# Altium PCB BuckConverter.PcbDoc
Units mil, origin at the board's own origin, x right, y up, seen from the top; angles counter-clockwise.
Board outline 3937.01 x 3937.01 mil, 2 copper layers (Top Layer, Bottom Layer); 134 components, 71 nets, 391 pads, 13 vias.
Unrouted connection lines stored in the file: 279.
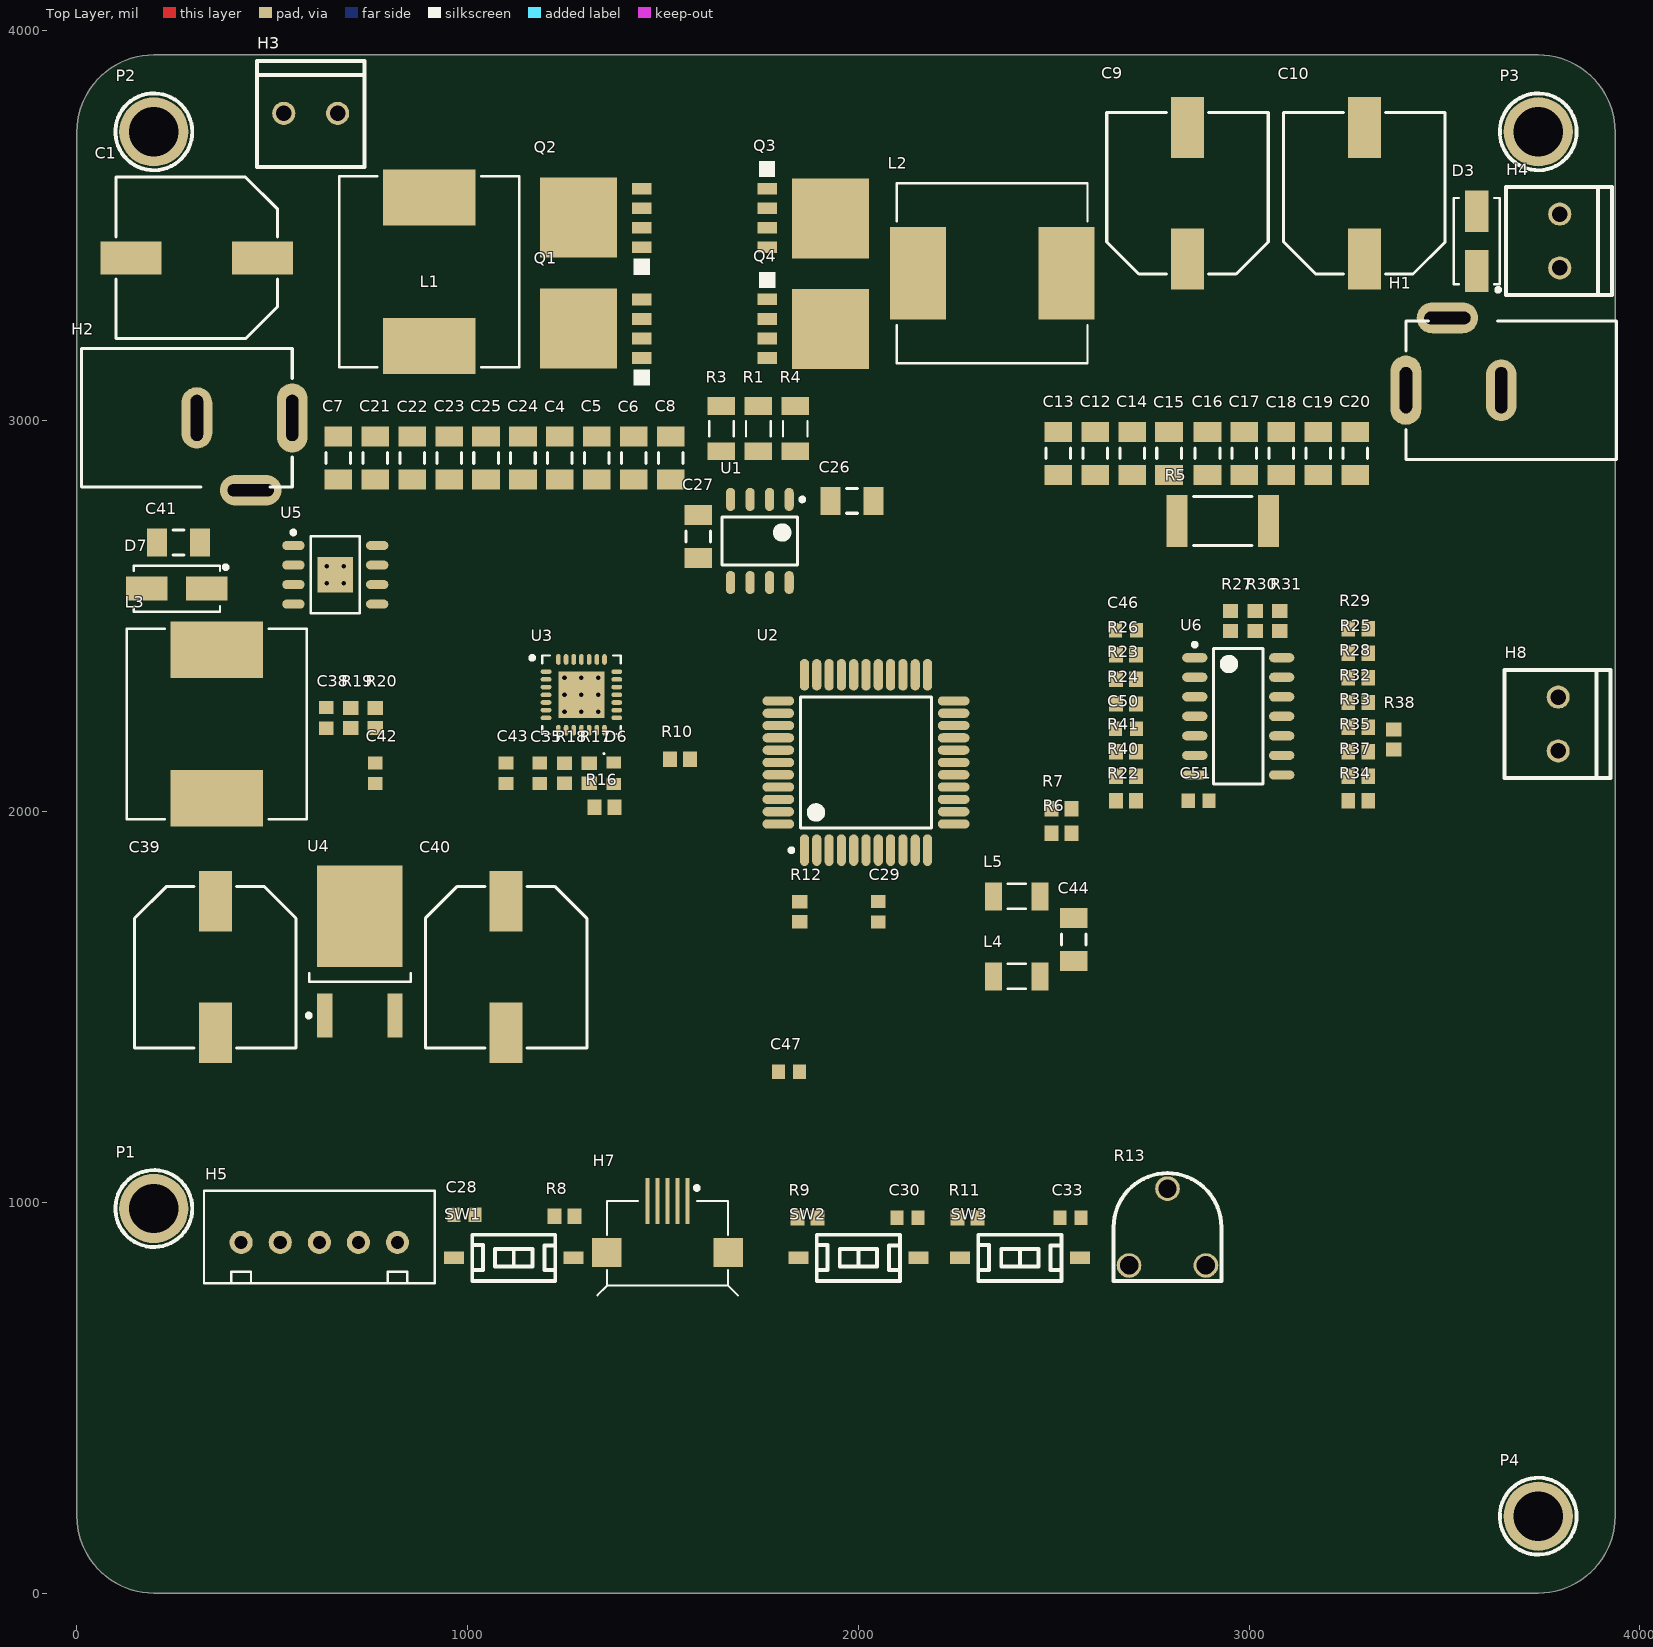
[diagram p0: Top Layer view]
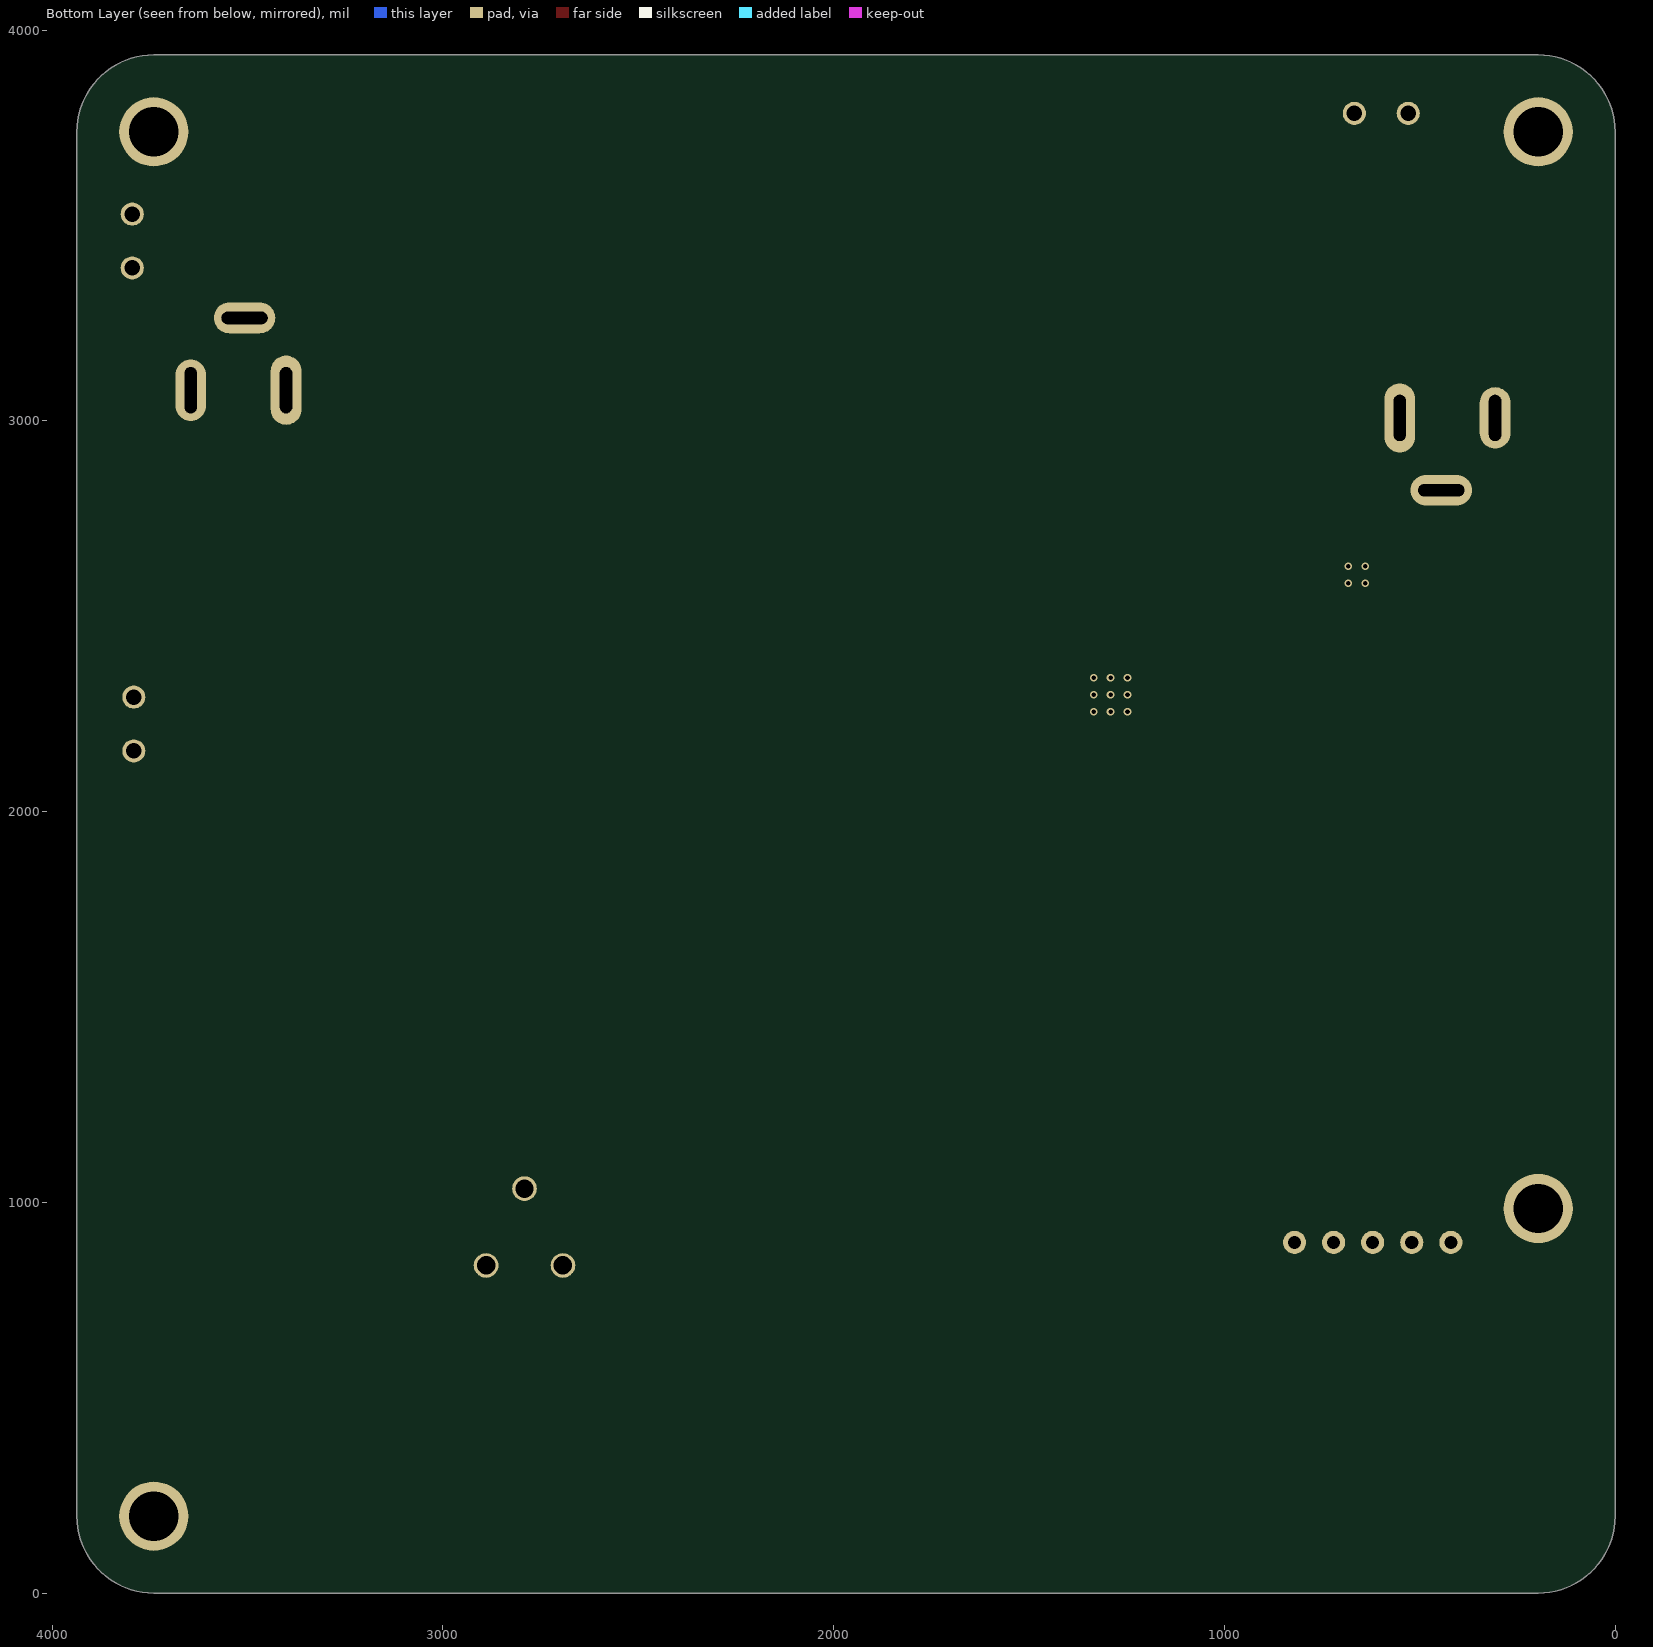
[diagram p1: Bottom Layer view, seen from below]

## Layer stack, top to bottom
Top Solder: solder mask 0.4, Solder Resist, Dk 3.5
Top Layer: signal copper 1.4
Dielectric 1: dielectric 12.6, FR-4, Dk 4.8
Bottom Layer: signal copper 1.4
Bottom Solder: solder mask 0.4, Solder Resist, Dk 3.5

## Board outline
0,196.85 0,3740.16 cw(c196.85,3740.16) 196.85,3937.01 3740.16,3937.01 cw(c3740.16,3740.16) 3937.01,3740.16 3937.01,196.85 cw(c3740.16,196.85) 3740.16,0 196.85,0 cw(c196.85,196.85)

## Design rules (kind name [scope] priority, off if disabled: settings)
Clearance [All] p1: gap=10 ignorepadtopadclearanceinfootprint=FALSE except(0: Arc-Hole Track-Hole SMDPad-Hole THPad-Hole Via-Hole Fill-Hole Poly-Hole Region-Hole Text-Hole; 6: SMDPad-SMDPad)
ComponentClearance [All] p1 off: gap=10 collisioncheckmode=3 verticalgap=10 showdistances=FALSE
Height [All] p1 off: minheight=0 maxheight=1000 prefheight=500
HoleSize [All] p1: absolutevalues=TRUE maxlimit=1100 minlimit=0.98 maxpercent=80.000 minpercent=20.000
MinimumSolderMaskSliver [InComponent('*')] p1: minsoldermaskwidth=0
PolygonConnect [All] p1: connectstyle=Relief reliefconductorwidth=10 reliefentries=4 polygonreliefangle="90 Angle" airgapwidth=10
RoutingVias [All] p1: holewidth=28 width=50 viastyle="Through Hole" minholewidth=28 minwidth=50 maxholewidth=28 maxwidth=50
SolderMaskExpansion [All] p1: expansion=4
Width [All] p1: maxlimit=100 minlimit=10 preferedwidth=10
26 further rules are at their usual default settings.

## Classes and differential pairs
component class Designator: C45 C46 C47 C48 C49 C50 C51 C52 H8 R22 R23 R24 R25 R26 R27 R28 R29 R30 R31 R32 R33 R34 R35 R36 R37 R38 R39 R40 R41 U6

## Components (designator, comment, footprint, x,y, rotation, side; value= is the part's Value field where it differs from the comment)
C1 "100uF" CAPAE109103X105N 307.09,3417.32 r0 top
C2 "22uF" CAP1206 12527.53,641.73 r0 top
C3 "22uF" CAP1206 12759.81,641.73 r0 top
C4 "10uF" CAP1206 1236.22,2905.51 r90 top
C5 "10uF" CAP1206 1330.71,2905.51 r90 top
C6 "10uF" CAP1206 1425.2,2905.51 r90 top
C7 "10uF" CAP1206 669.29,2905.51 r90 top
C8 "10uF" CAP1206 1519.68,2905.51 r90 top
C9 "100uF" CAPAE109103X105N 2842.52,3582.68 r270 top
C10 "100uF" CAPAE109103X105N 3295.28,3582.68 r270 top
C12 "10uF" CAP1206 2606.3,2917.32 r90 top
C13 "10uF" CAP1206 2511.81,2917.32 r90 top
C14 "10uF" CAP1206 2700.79,2917.32 r90 top
C15 "10uF" CAP1206 2795.28,2917.32 r90 top
C16 "10uF" CAP1206 2893.7,2917.32 r90 top
C17 "22uF" CAP1206 2988.19,2917.32 r90 top
C18 "22uF" CAP1206 3082.68,2917.32 r90 top
C19 "10uF" CAP1206 3177.17,2917.32 r90 top
C20 "10uF" CAP1206 3271.65,2917.32 r90 top
C21 "10uF" CAP1206 763.78,2905.51 r90 top
C22 "10uF" CAP1206 858.27,2905.51 r90 top
C23 "10uF" CAP1206 952.76,2905.51 r90 top
C24 "10uF" CAP1206 1141.73,2905.51 r90 top
C25 "10uF" CAP1206 1047.24,2905.51 r90 top
C26 "4.7uF" CAP1206 1984.25,2795.28 r180 top
C27 "4.7uF" CAP1206 1590.55,2704.72 r270 top
C28 "DNP" CAP0603 992.13,968.5 r180 top
C29 "10uF" CAP0603 2051.18,1744.09 r270 top
C30 "0.1uF" CAP0603 2125.98,960.63 r0 top
C31 "0.1uF" CAP0603 8444.86,3677.16 r0 top
C32 "0.1uF" CAP0603 8629.9,3653.53 r90 top
C33 "0.1uF" CAP0603 2543.31,960.63 r0 top
C34 "0.1uF" CAP0603 6972.42,3653.53 r90 top
C35 "1uF" CAP0603 1185.04,2098.43 r90 top
C36 "4.7uF" CAP0603 4460.62,3653.53 r90 top
C37 "0.1uF" CAP0603 4688.96,3653.53 r90 top
C38 "33nF" CAP0603 637.8,2240.16 r90 top
C39 "100uF" CAPAE109103X105N 354.33,1602.36 r90 top
C40 "100uF" CAPAE109103X105N 1098.43,1602.36 r90 top
C41 "10uF" CAP1206 259.84,2688.98 r0 top
C42 "0.1uF" CAP0603 763.78,2098.43 r90 top
C43 "0.1uF" CAP0603 1098.43,2098.43 r90 top
C44 "22uF" CAP1206 2551.18,1673.23 r90 top
C45 "1nF" CAP0603 4342.5,3291.33 r90 top
C46 "10nF" CAP0603 2685.04,2464.57 r0 top
C47 "10nF" CAP0603 1822.83,1334.65 r0 top
C48 "10nF" CAP0603 6279.51,4838.57 r90 top
C49 "10nF" CAP0603 5590.54,4838.57 r90 top
C50 "0.1uF" CAP0603 2685.04,2212.6 r180 top
C51 "0.1uF" CAP0603 2871.06,2027.56 r0 top
C52 "0.1uF" CAP0603 4019.67,4838.57 r90 top
D1 "PWR" LED0603 16267.68,657.48 r0 top
D2 "SMAJ90A" SMA 12314.93,547.24 r90 top
D3 "SMAJ90A" SMA 3582.68,3460.63 r270 top
D4 "LED" LED0603 6826.76,3677.16 r0 top
D5 "LED" LED0603 6436.99,3677.16 r0 top
D6 "LED" LED0603 1374.02,2098.43 r90 top
D7 "SS310" SMA 255.91,2570.87 r0 top
D8 "PWR" LED0603 4251.96,4318.89 r0 top
H1 "PWR-2.5" PWR-2.5 3645.67,3078.74 r180 top
H2 "PWR-2.5" PWR-2.5 307.09,3007.87 r0 top
H3 "Connector-2P" KF350 598.43,3787.4 r180 top
H4 "Connector-2P" KF350 3795.28,3460.63 r90 top
H5 "xh2.54" XH2.54_5A 620.47,897.64 r0 top
H6 "LCD" LCD-2.4' 9459.06,192.91 r90 top
H7 "USB-5p" USB_Micro 1511.81,787.09 r270 top
H8 "Connector-2P" KF350 3791.34,2224.41 r90 top
L1 "10uH" CDRH125 901.57,3381.89 r270 top
L2 "15uH" CDRH125 2342.52,3377.95 r0 top
L3 "100uH" CDRH125 358.27,2224.41 r270 top
L4 "Inductor" IND1206 2405.51,1578.74 r0 top
L5 "Inductor" IND1206 2405.51,1783.46 r0 top
P1 "Pad" PAD320R450 196.85,984.25 r0 top
P2 "Pad" PAD320R450 196.85,3740.16 r0 top
P3 "Pad" PAD320R450 3740.16,3740.16 r0 top
P4 "Pad" PAD320R450 3740.16,196.85 r0 top
Q1 "MOS-N4" QFN5x6 1330.71,3236.02 r90 top
Q2 "MOS-N4" QFN5x6 1330.71,3519.65 r90 top
Q3 "MOS-N4" QFN5x6 1881.5,3519.65 r270 top
Q4 "MOS-N4" QFN5x6 1881.89,3236.22 r270 top
R1 "2R" RES1206 1744.09,2980.32 r90 top
R2 "2k" RES0603 16098.39,657.48 r0 top
R3 "2R" RES1206 1649.61,2980.32 r90 top
R4 "2R" RES1206 1838.58,2980.32 r90 top
R5 "R010" RESC6432X07N 2933.07,2744.09 r0 top
R6 "10k" RES0603 2519.68,1944.88 r180 top
R7 "10k" RES0603 2519.68,2007.87 r180 top
R8 "10k" RES0603 1248.03,964.57 r180 top
R9 "10k" RES0603 1870.08,960.63 r0 top
R10 "0R" RES0603 1543.31,2133.86 r0 top
R11 "10k" RES0603 2279.53,960.63 r0 top
R12 "0R" RES0603 1850.39,1744.09 r270 top
R13 "RPot" RM065 2791.34,1074.8 r0 top
R14 "470R" RES0603 6582.66,3653.53 r90 top
R15 "470R" RES0603 6192.9,3653.53 r90 top
R16 "1k" RES0603 1350.39,2011.81 r180 top
R17 "10k" RES0603 1311.02,2098.43 r270 top
R18 "4.7k" RES0603 1248.03,2098.43 r90 top
R19 "30k" RES0603 700.79,2240.16 r90 top
R20 "4.7k" RES0603 763.78,2240.16 r270 top
R21 "1k" RES0603 4043.3,4318.89 r0 top
R22 "22k" RES0603 2685.04,2027.56 r180 top
R23 "22k" RES0603 2685.04,2338.58 r180 top
R24 "1k" RES0603 2685.04,2275.59 r0 top
R25 "1k" RES0603 3279.53,2405.51 r0 top
R26 "10k" RES0603 2685.04,2401.57 r180 top
R27 "1k" RES0603 2952.76,2488.19 r270 top
R28 "30k" RES0603 3279.53,2342.52 r0 top
R29 "10k" RES0603 3279.53,2468.5 r180 top
R30 "30k" RES0603 3015.75,2488.19 r90 top
R31 "1k" RES0603 3078.74,2488.19 r90 top
R32 "1k" RES0603 3279.53,2279.53 r0 top
R33 "30k" RES0603 3279.53,2216.54 r180 top
R34 "10k" RES0603 3279.53,2027.56 r180 top
R35 "30k" RES0603 3279.53,2153.54 r180 top
R36 "30k" RES0603 6047.23,4838.57 r90 top
R37 "1k" RES0603 3279.53,2090.55 r180 top
R38 "5k" RES0603 3370.08,2185.04 r270 top
R39 "1k" RES0603 5358.25,4838.57 r90 top
R40 "10k" RES0603 2685.04,2090.55 r180 top
R41 "10k" RES0603 2685.04,2153.54 r0 top
SW1 "push button" "SW-PB SMD" 1118.11,858.27 r270 top
SW2 "push button" "SW-PB SMD" 2000,858.27 r270 top
SW3 "push button" "SW-PB SMD" 2413.39,858.27 r270 top
TP1 "TP" PAD85R 18854.29,649.6 r0 top
TP2 "TP" PAD85R 15854.3,649.6 r90 top
TP3 "TP" PAD85R 6547.23,649.6 r90 top
TP4 "TP" PAD85R 6775.57,649.6 r90 top
U1 "UCC27212" SOP127P600X175-8N 1748.03,2692.91 r270 top
U2 "dsPIC33EP64GS504" TQFP-PT44_M 2019.68,2125.98 r90 top
U3 "CP2102" QFN28 1291.34,2299.21 r0 top
U4 "AMS1086CD" DPAK228P1003X238-3N 724.41,1641.73 r90 top
U5 "XL7005A" SOIC127P600X175_HS-9N 661.42,2606.3 r0 top
U6 "TLV2371" SOIC127P600X175-14N 2972.44,2244.09 r0 top

## Footprints (in the part's own frame and the unit in brackets; to place one, negate y for a bottom-side part, rotate by r counter-clockwise, add the part's x,y. Pads: shape width x height; smd on the part's side, far side on the other; paste and mask are expansions set on the pad)
CAP0603 [mm] "Chip Capacitor, 2-Leads, Body 1.60x0.80mm, IPC Medium Density"
  rect 0.85x0.95 smd: 1(-0.675,0) 2(0.675,0)
  body extent -0.85,-0.45 0.85,0.45, height 0.55
CAP1206 [mm] "Chip Capacitor, 2-Leads, Body 3.20x1.60mm, IPC Medium Density"
  rect 1.3x1.8 smd: 1(-1.4,0) 2(1.4,0)
  silkscreen extent -0.35,-0.8 0.35,0.8, body extent -1.6,-0.8 1.6,0.8, height 0.74
CAPAE109103X105N [mm] "Aluminum Electrolytic Capacitor, Body 10.30x10.30x10.50mm, IPC Medium Density"
  rect 3.95x2.15 smd: 1(-4.275,0) 2(4.275,0)
  silkscreen extent -5.25,-5.25 5.25,5.25, body extent -5.45,-5.25 5.45,5.25, height 10.5
CDRH125 [mm] "Molded Inductor, 2-Leads, Body 12.00x11.70mm, IPC Medium Density"
  rect 3.65x6 smd: 1(-4.825,0) 2(4.825,0)
  silkscreen extent -6.2,-5.85 6.2,5.85, body extent -6.17,-6 6.17,6, height 6.3
DPAK228P1003X238-3N [mm] "D-PAK, 3-Pads, Body 6.15x6.66mm (max), IPC Medium Density"
  rect 2.85x1 smd: 1(-4.15,2.28) 3(-4.15,-2.28)
  rect 6.6x5.55 smd: 2(2.3,0)
  silkscreen extent -4.27,-3.3 -1.4,3.45, body extent -5,-3.34 5.1,3.39, height 2.37
IND1206 [mm] "Chip Inductor, 2-Leads, Body 3.20x1.60mm, IPC Medium Density"
  rect 1.09x1.82 smd: 1(-1.51,0) 2(1.51,0)
  silkscreen extent -0.6,-0.81 0.6,0.81, body extent -1.7,-0.9 1.7,0.9, height 0.6
KF350 [mm] "Pitch 3.5mm"
  round 1.5 hole 1: 1(-1.75,0) 2(1.75,0)
  silkscreen extent -3.5,-3.4 3.5,3.5
LCD-2.4' [mm]
  round 4.5 hole 3: 0(1,31.2) 0(1,-5.8) 0(67.26,-5.8) 0(67.26,31.2)
  round 1.2 hole 0.85: 1(0,0) 2(0,2.54) 3(0,5.08) 4(0,7.62) 5(0,10.16) 6(0,12.7) 7(0,15.24) 8(0,17.78) 9(0,20.32) 10(0,22.86) 11(0,25.4)
  silkscreen extent -2,-8.8 70.26,34.2
LED0603 [mm] "Chip Diode, 2-Leads, Body 1.60x0.80mm, IPC Medium Density"
  rect 0.8x0.95 smd: 1(-0.7,0) 2(0.7,0)
  silkscreen extent 1.22,0.59 1.32,0.68, body extent -0.81,-0.4 0.81,0.4, height 0.6
PAD85R [mm]
  round 1.2 hole 0.85: 1(0,0)
  silkscreen extent -0.9,-0.9 0.9,0.9
PAD320R450 [mm]
  round 4.5 hole 3.2: 1(0,0)
  silkscreen extent -2.5,-2.5 2.5,2.5
PWR-2.5 [mm]
  oval 2x4.5 hole 0.8 slot 3 at 90 deg: 1(6.2,0)
  oval 2x4 hole 0.8 slot 3 at 90 deg: 2(0,0)
  oval 4x2 hole 0.8 slot 3 at 0 deg: 3(3.5,-4.7)
  silkscreen extent -7.5,-4.5 6.2,4.5, body extent -8.3,-4.7 6.9,4.7, height 11
QFN5x6 [mil]
  rect 30x50 smd paste+1.5 mask+1.5: 1(-75,-115) 2(-25,-115) 3(25,-115) 4(75,-115)
  rect 204.72x196.85 smd paste+0.64 mask+0.64: 5(0.79,46.85)
  silkscreen extent -145,-135 -105,-95
QFN28 [mm] "PQFN, 28-Leads, Body 5.00x5.00mm, Pitch 0.50mm, Thermal Pad 3.10x3.10mm, IPC Medium Density"
  oval 0.7x0.3 smd: 1(-2.3,1.5) 2(-2.3,1) 3(-2.3,0.5) 4(-2.3,0) 5(-2.3,-0.5) 6(-2.3,-1) 7(-2.3,-1.5) 15(2.3,-1.5) 16(2.3,-1) 17(2.3,-0.5) 18(2.3,0) 19(2.3,0.5) 20(2.3,1) 21(2.3,1.5)
  oval 0.3x0.7 smd: 8(-1.5,-2.3) 9(-1,-2.3) 10(-0.5,-2.3) 11(0,-2.3) 12(0.5,-2.3) 13(1,-2.3) 14(1.5,-2.3) 22(1.5,2.3) 23(1,2.3) 24(0.5,2.3) 25(0,2.3) 26(-0.5,2.3) 27(-1,2.3) 28(-1.5,2.3)
  rect 3x3 smd: 29(0,0)
  silkscreen extent -3.32,-2.55 2.55,2.55, body extent -2.5,-2.5 2.5,2.5, height 1
RES0603 [mm] "Chip Resistor, 2-Leads, Body 1.60x0.80mm, IPC Medium Density"
  rect 0.9x1 smd: 1(-0.65,0) 2(0.65,0)
  body extent -0.85,-0.38 0.85,0.42, height 0.56
RES1206 [mm] "Chip Resistor, 2-Leads, Body 3.20x1.60mm, IPC Medium Density"
  rect 1.15x1.8 smd: 1(-1.475,0) 2(1.475,0)
  silkscreen extent -0.5,-0.8 0.5,0.8, body extent -1.6,-0.8 1.6,0.8, height 0.6
RESC6432X07N [mm] "Chip Resistor, 2-Leads, Body 6.40x3.20mm, IPC Medium Density"
  rect 1.35x3.4 smd: 1(-2.975,0) 2(2.975,0)
  silkscreen extent -1.9,-1.6 1.9,1.6, body extent -3.3,-1.7 3.3,1.7, height 0.7
RM065 [mm]
  round 1.6 hole 1.2: 1(-2.5,-6) 2(0,-1) 3(2.5,-6)
  silkscreen extent -3.5,-7 3.5,0, body extent -3.25,-7.14 3.25,0.1, height 7.7
SMA [mm] "Molded Diode, 2-Leads, Body 5.20x2.60mm, IPC Medium Density"
  rect 2.7x1.55 smd: 1(-1.95,0) 2(1.95,0)
  silkscreen extent -2.8,-1.5 3.3,1.52, body extent -2.6,-1.3 2.6,1.3, height 2
SOIC127P600X175-14N [mm] "SOIC, 14-Leads, Body 8.65x3.90mm, Pitch 1.27mm, IPC Medium Density"
  oval 1.65x0.6 smd: 1(-2.825,3.81) 2(-2.825,2.54) 3(-2.825,1.27) 4(-2.825,0) 5(-2.825,-1.27) 6(-2.825,-2.54) 7(-2.825,-3.81) 8(2.825,-3.81) 9(2.825,-2.54) 10(2.825,-1.27) 11(2.825,0) 12(2.825,1.27) 13(2.825,2.54) 14(2.825,3.81)
  silkscreen extent -2.95,-4.4 1.6,4.78, body extent -3,-4.4 3,4.4, height 1.75
SOIC127P600X175_HS-9N [mm] "SOIC, 8-Leads, Body 4.90x3.91mm, Pitch 1.27mm, Thermal Pad 2.30x2.30mm, IPC Medium Density"
  oval 1.45x0.6 smd: 1(-2.725,1.905) 2(-2.725,0.635) 3(-2.725,-0.635) 4(-2.725,-1.905) 5(2.725,-1.905) 6(2.725,-0.635) 7(2.725,0.635) 8(2.725,1.905)
  rect 2.3x2.3 smd: 9(0,0)
  silkscreen extent -2.85,-2.5 1.6,2.88, body extent -3,-2.5 3,2.5, height 1.75
SOP127P600X175-8N [mm] "SOP, 8-Leads, Body 4.90x3.90mm, Pitch 1.27mm, IPC Medium Density"
  oval 1.5x0.6 smd: 1(-2.7,1.905) 2(-2.7,0.635) 3(-2.7,-0.635) 4(-2.7,-1.905) 5(2.7,-1.905) 6(2.7,-0.635) 7(2.7,0.635) 8(2.7,1.905)
  silkscreen extent -2.82,-2.45 1.55,2.88, body extent -3,-2.45 3,2.45, height 1.75
"SW-PB SMD" [mm]
  rect 0.8x1.3 smd: 1(0,3.9) 2(0,-3.9)
  silkscreen extent -1.5,-2.7 1.5,2.7, body extent -1.8,-4 1.8,4, height 2.5
TQFP-PT44_M [mm] "Thin QFP, 44-Leads, Body 10x10mm, Pitch 0.8mm, IPC Low Density"
  oval 2.05x0.6 smd: 1(-5.7,4) 2(-5.7,3.2) 3(-5.7,2.4) 4(-5.7,1.6) 5(-5.7,0.8) 6(-5.7,0) 7(-5.7,-0.8) 8(-5.7,-1.6) 9(-5.7,-2.4) 10(-5.7,-3.2) 11(-5.7,-4) 23(5.7,-4) 24(5.7,-3.2) 25(5.7,-2.4) 26(5.7,-1.6) 27(5.7,-0.8) 28(5.7,0) 29(5.7,0.8) 30(5.7,1.6) 31(5.7,2.4) 32(5.7,3.2) 33(5.7,4)
  oval 0.6x2.05 smd: 12(-4,-5.7) 13(-3.2,-5.7) 14(-2.4,-5.7) 15(-1.6,-5.7) 16(-0.8,-5.7) 17(0,-5.7) 18(0.8,-5.7) 19(1.6,-5.7) 20(2.4,-5.7) 21(3.2,-5.7) 22(4,-5.7) 34(4,5.7) 35(3.2,5.7) 36(2.4,5.7) 37(1.6,5.7) 38(0.8,5.7) 39(0,5.7) 40(-0.8,5.7) 41(-1.6,5.7) 42(-2.4,5.7) 43(-3.2,5.7) 44(-4,5.7)
  silkscreen extent -5.82,-4.25 4.25,4.97, body extent -5,-5 5,5, height 1.2
USB_Micro [mm]
  rect 3x0.25 smd: 1(-5.508,1.3) 2(-5.508,0.65) 3(-5.508,0) 4(-5.508,-0.65) 5(-5.508,-1.3)
  rect 1.9x1.9 smd: ""(-2.15,3.95) ""(-2.15,-3.95)
  silkscreen extent -6.47,-4.57 0.63,4.57, body extent -5.44,-3.99 -0.01,3.99, height 2.77
XH2.54_5A [mm]
  round 1.5 hole 0.85: 1(-5.08,0) 2(-2.54,0) 3(0,0) 4(2.54,0) 5(5.08,0)
  silkscreen extent -7.5,-2.65 7.5,3.35, body extent -7.45,-2.52 7.45,3.23, height 7

## Part data
C1 C9 C10 C39 C40: library part CAP_Pol, "cap pol", Capacitance Value=47uF, Rated Voltage=50V, Tolerance="+\- 10%"
C2 C3 C4 C5 C6 C7 C8 C12 C13 C14 C15 C16 C17 C18 C19 C20 C21 C22 C23 C24 C25 C26 C27 C28 C29 C35 C36 C38 C41 C44 C45 C46 C47 C48 C49: library part CAP, "CAP NON-POL", Capacitance Value=0.1uF, Rated Voltage=50V, Tolerance=+/-10%
C30 C31 C32 C33 C34 C37 C42 C43 C50 C51 C52: library part CAP, "CAP NON-POL", Rated Voltage=50V, Tolerance=+/-10%, Capacitance Value=0.1uF
D1 D8: library part LED, "led"
D2 D3 D7: library part Diode, "diode"
D4 D5 D6: "led"
H5: library part XH2.54_5P, "pitch2.54"
H6: library part LCD_2.4', "2.4' TFT Module"
H7: library part USB_5P, "USB_5P"
L1 L2 L3: library part Inductor, "Inductor"
P1 P2 P3 P4: "PAD"
Q1 Q2 Q3 Q4: "N Channel MOSFET"
R1 R2 R3 R4 R5 R6 R7 R8 R9 R10 R11 R12 R14 R15 R16 R17 R18 R19 R20 R21 R22 R23 R24 R25 R26 R27 R28 R29 R30 R31 R32 R33 R34 R35 R36 R37 R38 R39 R40 R41: library part RES, "res"
R13: "Potentiometer"
SW1 SW2 SW3: library part SW-PB
TP1 TP2 TP3 TP4: library part Test_Point, "test point"
U1: library part UCC27211, "UCC2721x 120-V Boot, 4-A Peak, High-Frequency High-Side and Low-Side Driver"
U4: "LDO"
U5: "0.4A 150KHz 80V Buck DC to DC Converter"
U6: library part TLV2374, "550uA/Ch 3-MHz RAIL-TO-RAIL INPUT/OUTPUT OPERATIONAL AMPLIFIERS"

## Via types
v1: diameter 19.68, hole 11.81, Top Layer to Bottom Layer, 13 vias

## Nets (pads, with @x,y where several pads share a name; then routed paths per layer and width w, separated by ;. In a path a pad name is that pad's centre, name@x,y a point inside that pad or via, vN(x,y) a via of type N, cw(c..) or ccw(c..) an arc to the next point about the centre after c; other vN are vias at no path point)
3V3: C31.1 C32.1 C40.2 C43.1 H5.2 H6.2 L4.1 R8.1 R9.1 R11.1 R14.2 R15.2 R21.1 U2.29 U2.40 U4.3
9V5: C26.2 C38.1 C39.2 C42.1 L3.2 R19.1 U1.1 U4.2
A3V3: C34.1 C44.1 C52.1 L4.2 R13.1 R40.2 U2.17 U6.4
AGND: C34.2 C44.2 C46.2 C47.2 C48.2 C49.2 C50.2 C51.2 C52.2 L5.2 R25.2 R27.1 R32.1 R39.2 R41.1 U2.16 U6.11
BLK: H6.7 U2.4
DC: H6.6 U2.3
GHO: R1.1 U1.3
GHS: C27.1 R3.1 U1.4
GLO: R4.1 U1.8
GND: C1.1 C2.1 C3.1 C4.1 C5.1 C6.1 C7.1 C8.1 C12.1 C13.1 C14.1 C15.1 C16.1 C21.1 C22.1 C23.1 C24.1 C25.1 C26.1 C28.1 C29.2 C30.2 C31.2 C32.2 C33.2 C35.1 C36.1 C37.1 C39.1 C40.1 C41.1 C42.2 C43.2 D1.2 D2.1 D7.1 D8.2 H1.2 H2.2 H3.2 H5.3 H6.1 H7.5 L5.1 Q3.1 Q3.2 Q3.3 Q4.1 Q4.2 Q4.3 R5.1 R6.1 R7.1 R13.3 R17.2 R20.2 SW1.1 SW2.1 SW3.1 TP3.1 U1.7 U2.6 U2.30 U2.39 U3.3 U3.29 U4.1 U5.5 U5.6 U5.7 U5.8 U5.9
  other v1: 1248.03,2255.91 1291.34,2255.91 1334.65,2255.91 1248.03,2299.21 1291.34,2299.21 1334.65,2299.21 1248.03,2342.52 1291.34,2342.52 1334.65,2342.52 639.76,2584.65 683.07,2584.65 639.76,2627.95 683.07,2627.95
L_CS: H6.9 U2.11
LED1: D4.2 U2.15
LED2: D5.2 U2.20
MCLR: C28.2 H5.1 R8.2 SW1.2 U2.18
MISO: H6.8 U2.10
MOSI: H6.4 U2.9
NetC1_2: C1.2 C2.2 C3.2 C41.2 D2.2 H2.1 H3.1 L1.1 R36.2 TP1.1 U5.1
NetC9_1: C9.1 C10.1 C17.1 C18.1 C19.1 C20.1 D3.1 H4.2 R5.2 R24.1 R30.2 TP4.1
NetC9_2: C9.2 C10.2 C12.2 C13.2 C14.2 C15.2 C16.2 C17.2 C18.2 C19.2 C20.2 D3.2 H1.1 H4.1 L2.2 R2.1 R28.2 TP2.1
NetC27_2: C27.2 U1.2
NetC29_1: C29.1 U2.7
NetC30_1: C30.1 R9.2 R10.1 SW2.2
NetC33_1: C33.1 R11.2 R12.1 SW3.2
NetC35_2: C35.2 H7.1 U3.7 U3.8
NetC38_2: C38.2 R19.2 R20.1 U5.3
NetC45_1: C45.1 R22.2 R24.2 U6.3
NetC45_2: C45.2 R23.1 R27.2 U6.2
NetC46_1: C46.1 R26.2 U2.21
NetC47_1: C47.1 R29.1 U2.22
NetC48_1: C48.1 R34.2 U2.23
NetC49_1: C49.1 R36.1 R39.1 U2.25
NetC50_1: C50.1 R40.1 R41.2 U6.5
NetD1_1: D1.1 R2.2
NetD4_1: D4.1 R14.1
NetD5_1: D5.1 R15.1
NetD6_1: D6.1 R16.1
NetD6_2: D6.2 U3.12
NetD7_2: D7.2 L3.1 U5.2
NetD8_1: D8.1 R21.2
NetH7_2: H7.2 U3.5
NetH7_3: H7.3 U3.4
NetH8_1: H8.1 R35.1 R38.2
NetH8_2: H8.2 R33.1 R38.1
NetL2_1: L2.1 Q1.1 Q1.2 Q1.3 Q2.1 Q2.2 Q2.3 Q3.5 Q4.5 R3.2
NetQ1_4: Q1.4 Q2.4 R1.2
NetQ3_4: Q3.4 Q4.4 R4.2
NetR6_2: R6.2 U1.5 U2.12
NetR7_2: R7.2 U1.6 U2.13
NetR13_2: R13.2 U2.24
NetR17_1: R17.1 U3.11
NetR18_1: R18.1 U3.9
NetR23_2: R23.2 R26.1 U6.1
NetR25_1: R25.1 R28.1 U6.12
NetR29_2: R29.2 R31.1 U6.14
NetR30_1: R30.1 R31.2 U6.13
NetR32_2: R32.2 R33.2 U6.10
NetR34_1: R34.1 R37.2 U6.8
NetR35_2: R35.2 R37.1 U6.9
PGC2: H5.5 U2.35
PGD2: H5.4 U2.34
PV: C4.2 C5.2 C6.2 C7.2 C8.2 C21.2 C22.2 C23.2 C24.2 C25.2 L1.2 Q1.5 Q2.5
REF_1V65: C51.1 R22.1 U2.26 U6.6 U6.7
RST: H6.5 U2.2
RXD: U2.38 U3.25
SCLK: H6.3 U2.8
SW1: R10.2 U2.41
SW2: R12.2 U2.1
T_CS: H6.10 U2.5
T_IRQ: H6.11 U2.14
TXD: U2.37 U3.26
VDD: C36.2 C37.2 R16.2 R18.2 U3.6
pads on no net: H1.3 H2.3 H6.0 H7. H7.4 P1.1 P2.1 P3.1 P4.1 U2.19 U2.27 U2.28 U2.31 U2.32 U2.33 U2.36 U2.42 U2.43 U2.44 U3.1 U3.2 U3.10 U3.13 U3.14 U3.15 U3.16 U3.17 U3.18 U3.19 U3.20 U3.21 U3.22 U3.23 U3.24 U3.27 U3.28 U5.4

## Silkscreen, mask and mechanical layers (free items; w line width, h text height)
Mechanical 1:
  lines w10: 0,196.85 0,3740.16 cw(c196.85,3740.16) 196.85,3937.01 3740.16,3937.01 cw(c3740.16,3740.16) 3937.01,3740.16 3937.01,196.85 cw(c3740.16,196.85) 3740.16,0 ; 0,984.25 ccw(c196.85,984.25) 196.85,787.4 3740.16,787.4